# EAGLE board gear2 (EAGLE 9.3.0)
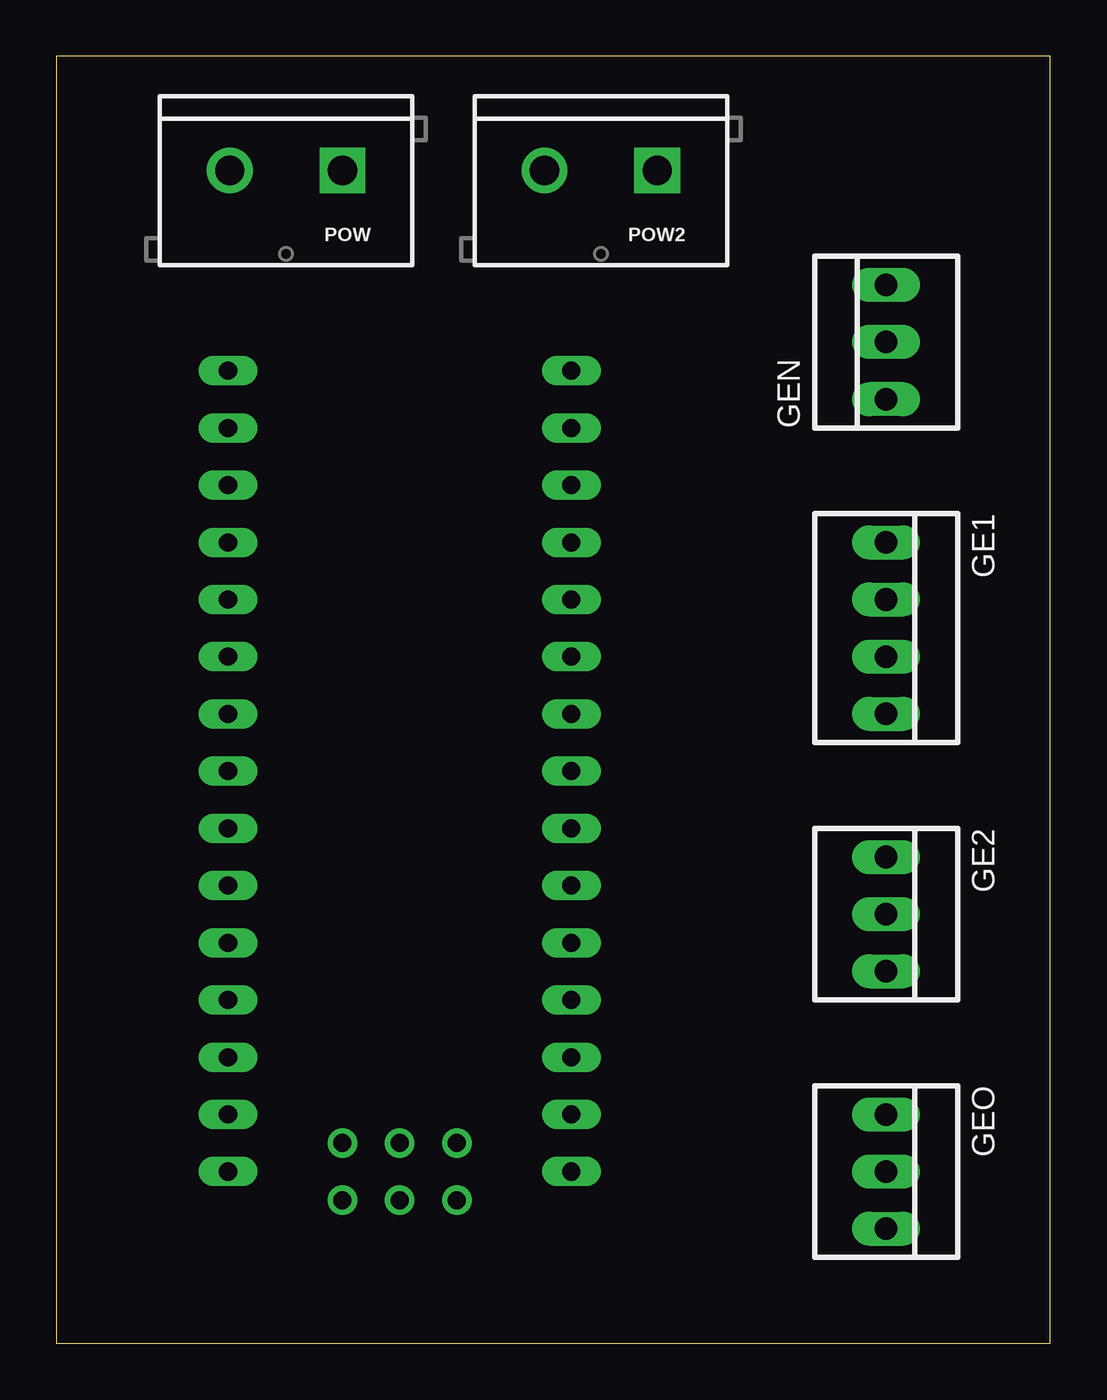
[diagram p0: board, top side]
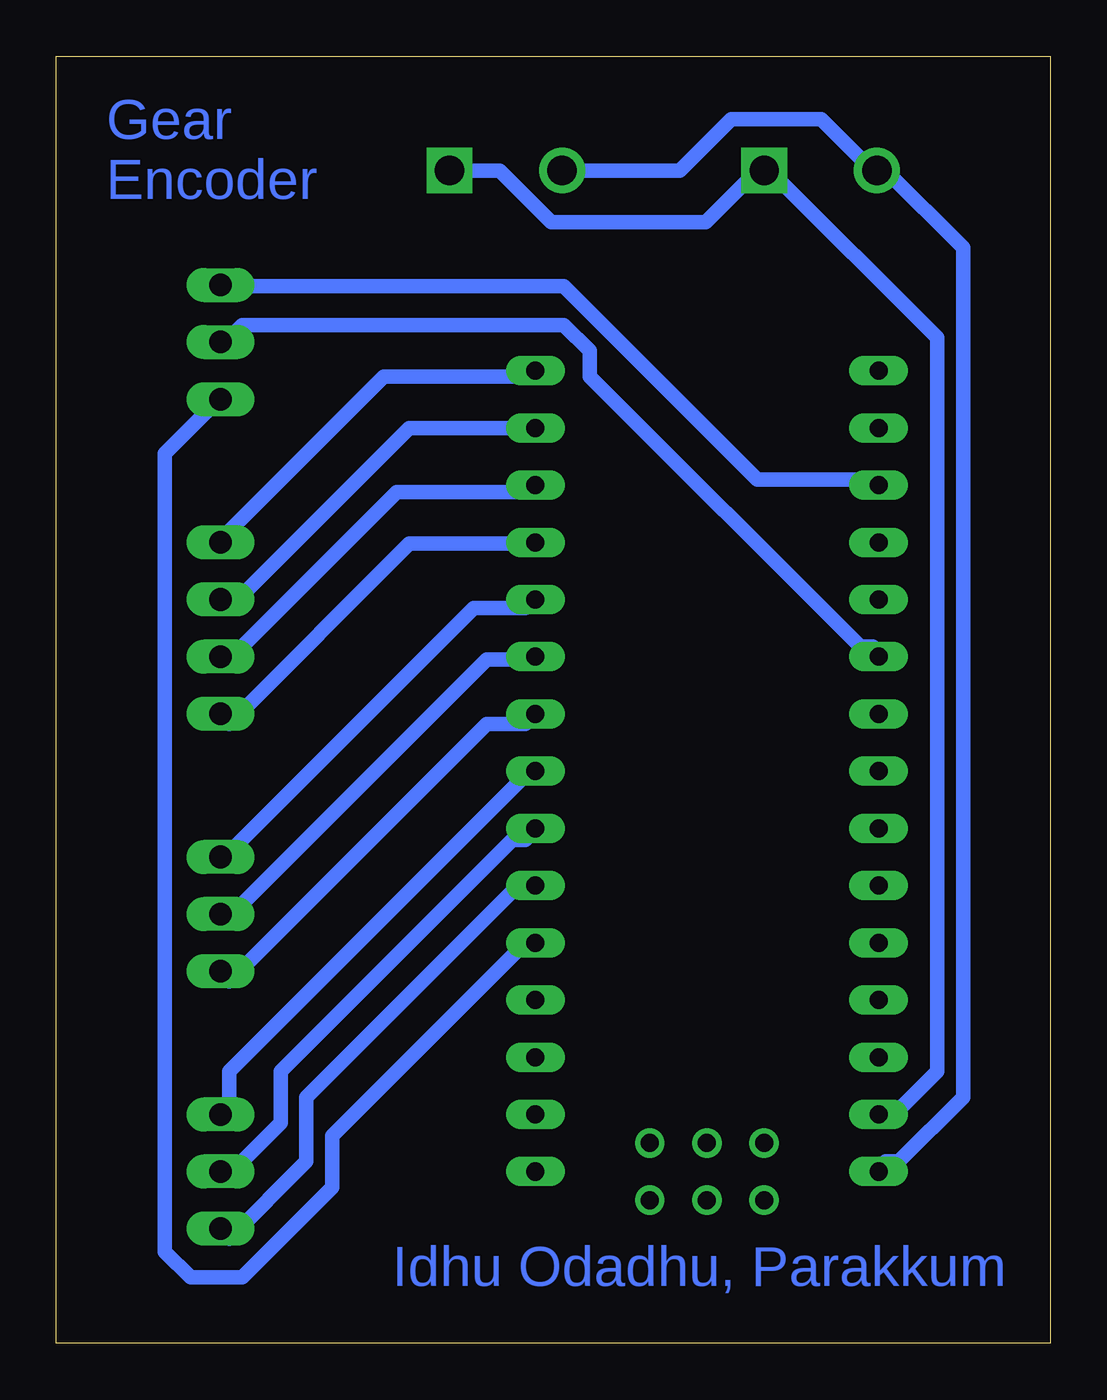
[diagram p1: board, bottom side, seen from below]

Size 44.12 x 57.14 mm. Coordinates in mm from the lower left corner, seen from the top.
Outline: 0,0 44.12,0 44.12,57.14 0,57.14 0,0
Copper layers (1*16): Top 0.035mm / dielectric 1.5mm / Bottom 0.035mm
Design rules "default": minimum track width 6mil, minimum drill 0.35mm, track to track 6mil, track to pad 6mil, pad to pad 6mil, via to via 6mil, smd to smd 6mil, copper to edge 40mil, drill to drill 6mil, minimum pad ring 10mil, minimum via ring 8mil, stop-mask expansion 4mil, vias tented up to drill 0mil, thermal gap 10mil
Net classes: 0 default: width 0.635 mm, drill 0.305 mm, clearance 0.508 mm

## Footprints (pad centres in the part's own frame; a part is rotated, then mirrored left to right if it is on the bottom)
22-23-2041 = drill 1 long: 1 -3.81,0; 2 -1.27,0; 3 1.27,0; 4 3.81,0
22-23-2031 = drill 1 long: 1 -2.54,0; 2 0,0; 3 2.54,0
SCREWTERMINAL-5MM-2 = drill 1.3 pad 2.032 square: 1 0,0 | drill 1.3 pad 2.032: 2 5,0
NANO = drill 0.8 long: 3.3V -10.16,24.13; 5V -10.16,-1.27; A0 -10.16,19.05; A1 -10.16,16.51; A2 -10.16,13.97; A3 -10.16,11.43; A4 -10.16,8.89; A5 -10.16,6.35; A6 -10.16,3.81; A7 -10.16,1.27; AREF -10.16,21.59; D2 5.08,1.27; D3 5.08,3.81; D4 5.08,6.35; D5 5.08,8.89; D6 5.08,11.43; D7 5.08,13.97; D8 5.08,16.51; D9 5.08,19.05; D10 5.08,21.59; D11 5.08,24.13; D12 5.08,26.67; D13 -10.16,26.67; GND -10.16,-6.35; GND1 5.08,-1.27; RAW -10.16,-8.89; RST -10.16,-3.81; RST1 5.08,-3.81; RX1 5.08,-6.35; TX0 5.08,-8.89 | drill 0.8: ICSP1 -5.08,-10.16; ICSP2 -5.08,-7.62; ICSP3 -2.54,-10.16; ICSP4 -2.54,-7.62; ICSP5 0,-10.16; ICSP6 0,-7.62

## Placement (x,y rotation side)
GE1  22-23-2041  [22-23-2041]  36.83,31.75 270 top
GE2  22-23-2031  [22-23-2031]  36.83,19.05 270 top
GEN  22-23-2031  [22-23-2031]  36.83,44.45 90 top
GEO  22-23-2031  [22-23-2031]  36.83,7.62 270 top
POW  [SCREWTERMINAL-5MM-2]  12.7,52.07 180 top
POW2  [SCREWTERMINAL-5MM-2]  26.67,52.07 180 top
U$1  NANO  [NANO]  17.78,16.51 0 top

## Library data of the parts
GE1 = con-molex; MF: MOLEX; MPN: 22-23-2041; OC_FARNELL: 1462920; OC_NEWARK: 38C0355
GE2 GEN GEO = con-molex; MF: MOLEX; MPN: 22-23-2031; OC_FARNELL: 1462950; OC_NEWARK: 30C0862
POW POW2 = SparkFun-Retired; SF_SKU: PRT-08432
U$1 = Arduino-clone

## Nets
N$1: GE1.1 U$1.D12
N$2: GE1.2 U$1.D11
N$3: GE1.3 U$1.D10
N$4: GE1.4 U$1.D9
N$5: GE2.1 U$1.D8
N$6: GE2.2 U$1.D7
N$7: GE2.3 U$1.D6
N$8: GEO.1 U$1.D5
N$9: GEO.2 U$1.D4
N$10: GEO.3 U$1.D3
N$11: POW2.1 POW.1 U$1.GND
N$12: POW2.2 POW.2 U$1.RAW
N$13: GEN.1 U$1.D2
N$14: GEN.2 U$1.A2
N$15: GEN.3 U$1.AREF

## Tracks (layer width: path | path; a pad name or v marks a point on that pad's centre or on a via)
N$1
  Bottom 0.635: U$1.D12 23.31,42.93 29.59,42.93 36.45,36.07 GE1.1
N$2
  Bottom 0.635: U$1.D11 28.45,40.64 36.45,32.64 GE1.2
N$3
  Bottom 0.635: U$1.D10 23.31,37.78 29.02,37.78 36.45,30.35 GE1.3
N$4
  Bottom 0.635: U$1.D9 23.31,35.5 28.45,35.5 36.45,27.5 GE1.4
N$5
  Bottom 0.635: U$1.D8 23.31,32.64 25.59,32.64 36.45,21.78 GE2.1
N$6
  Bottom 0.635: U$1.D7 23.31,30.35 25.02,30.35 36.45,18.92 GE2.2
N$7
  Bottom 0.635: U$1.D6 23.31,27.5 25.02,27.5 36.45,16.06 GE2.3
N$8
  Bottom 0.635: U$1.D5 23.31,25.21 36.45,12.06 36.45,10.35 GEO.1
N$9
  Bottom 0.635: U$1.D4 23.31,22.35 23.88,22.35 34.16,12.06 34.16,9.78 36.45,7.49 GEO.2
N$10
  Bottom 0.635: U$1.D3 23.31,20.07 23.88,20.07 33.02,10.92 33.02,8.06 36.45,4.64 GEO.3
N$11
  Bottom 0.635: U$1.GND 7.3,10.35 6.73,10.35 5.02,12.06 5.02,44.64 12.45,52.07 POW.1 13.02,52.07 15.3,49.78 22.16,49.78 24.45,52.07 POW2.1
N$12
  Bottom 0.635: U$1.RAW 7.3,8.06 6.73,8.06 3.87,10.92 3.87,48.64 7.3,52.07 POW.2 7.87,52.07 10.16,54.36 14.16,54.36 16.45,52.07 POW2.2
N$13
  Bottom 0.635: U$1.D2 23.31,17.78 31.88,9.21 31.88,6.92 35.88,2.92 38.16,2.92 39.31,4.06 39.31,39.5 37.02,41.78 GEN.1
N$14
  Bottom 0.635: U$1.A2 7.87,30.93 8.45,30.93 20.45,42.93 20.45,44.07 21.59,45.21 35.88,45.21 36.45,44.64 GEN.2
N$15
  Bottom 0.635: U$1.AREF 7.87,38.35 13.02,38.35 21.59,46.93 36.45,46.93 GEN.3

## Text on the board
Bottom: Gear / Encoder | Idhu Odadhu, Parakkum